# Altium PCB 400479.PcbDoc (part 2 of 2)
Units mm, origin at the board's own origin, x right, y up, seen from the top; angles counter-clockwise.
Board outline 46.04 x 15.24 mm, 4 copper layers (Top Layer, Mid-Layer 1, Mid-Layer 2, Bottom Layer), stack 2.007 mm thick; 83 components, 46 nets, 247 pads, 135 vias.
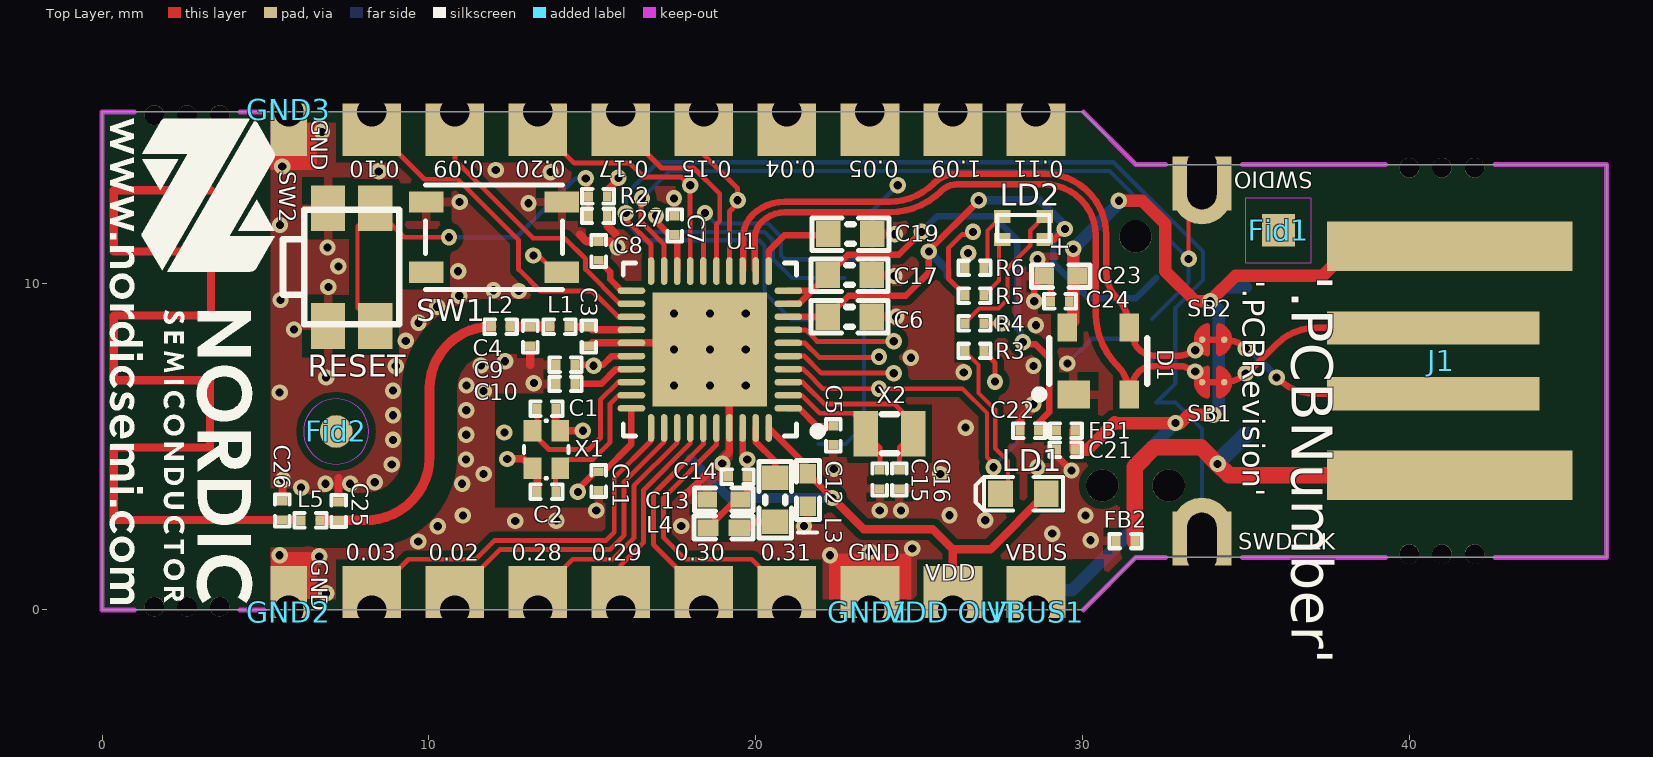
[diagram p0: Top Layer view]

## Via types
v1: diameter 0.5, hole 0.25, Top Layer to Bottom Layer, tented both sides, 135 vias

## Nets (pads, with @x,y where several pads share a name; then routed paths per layer and width w, separated by ;. In a path a pad name is that pad's centre, name@x,y a point inside that pad or via, vN(x,y) a via of type N, cw(c..) or ccw(c..) an arc to the next point about the centre after c; other vN are vias at no path point) (continued)
NetC8_1: (continued)
  Top Layer w0.2: C8.1@15.175,10.702 15.19,10.702 15.55,10.342 15.55,10.117 15.897,9.77 U1.21
NetC19_1: C19.1 U1.11 | length 2.6
  Top Layer w0.2: U1.11 20.4,10.983 20.882,11.465 ; 20.878,11.468 C19.1@22.21,11.468
NetD+_1: D+.1 J1.3 SB2.2 | length 7
  Top Layer w0.2: SB2.2 34.351,8.27 cw(c34.351,7.352) v1(35,8.001) ; v1(35.941,7.112) ccw(c37.144,8.315) 37.144,6.614 J1.3
  Bottom Layer w0.2: D+.1@35.077,8.001 35.966,7.112 v1@36.043,7.112
NetD-_1: D-.1 J1.2 SB1.2 | length 7
  Top Layer w0.2: SB1.2 34.351,6.97 ccw(c34.351,7.888) v1(35,7.239) ccw(c35,7.355) 35.082,7.273 35.941,8.132 cw(c37.144,6.929) 37.144,8.63 J1.2
NetFB2_1: FB2.1 J1.4 UGND.1 | length 12.4
  Top Layer w0.508: FB2.1 31.603,4.374 32.207,4.978 33.63,4.978 v1(34.138,4.47) 34.483,4.125 J1.4@39.853,4.125
  Bottom Layer w0.508: v1(34.138,4.47) 34.138,4.508 UGND.1
NetL3_1: L3.1 L4.2 | length 1.2
  Top Layer w0.2: L4.2 19.8,2.52 19.975,2.695 20.177,2.695 L3.1
NetL3_2: L3.2 U1.39 | length 1.8
  Top Layer w0.2: U1.39 20,5.15 20.6,4.55 L3.2
NetLD1_1: LD1.1 R3.1 | length 5.1
  Top Layer w0.127: R3.1 26.41,7.91 26.825,7.495 26.825,6.638 27.33,6.132 27.33,4.949 27.72,4.56 27.72,3.556 LD1.1
NetLD2_1: LD2.1 R4.1 | length 4.6
  Top Layer w0.127: R4.1 26.41,8.786 26.844,9.22 27.429,9.22 27.703,9.494 27.703,10.456 28.403,11.157 28.403,11.613 28.825,12.034 LD2.1
NetLD2_2: LD2.2 R5.2 | length 1.9
  Top Layer w0.127: R5.2 27.449,10.086 27.449,11.239 LD2.2
NetLD2_3: LD2.3 R6.2 | length 1.8
  Top Layer w0.127: R6.2 27.1,10.584 27.1,11.609 27.525,12.034 LD2.3
P0.00/XL1: C15.1 U1.2 X2.1 | length 4.3
  Top Layer w0.15: U1.2 21.41,6.57 21.962,6.018 22.975,6.018 ; 22.975,6.02 23.375,5.62 X2.1 23.8,4.97 C15.1
P0.01/XL2: C16.1 U1.3 X2.2 | length 6
  Top Layer w0.15: U1.3 21.433,6.97 21.55,6.853 21.552,6.853 22.1,6.305 24.239,6.305 24.825,5.718 X2.2 24.4,4.97 C16.1
P0.02/AIN0: 0.02.1 U1.32 | length 10.2
  Top Layer w0.15: 0.02.1@10.795,0 10.795,0.465 12.175,1.845 15.534,1.845 15.975,2.286 15.975,3.921 17.2,5.146 U1.32
P0.03/AIN1: 0.03.1 U1.31 | length 12.3
  Top Layer w0.15: 0.03.1@8.255,0 8.255,0.429 9.378,1.552 11.432,1.552 12.002,2.122 15.42,2.122 15.675,2.377 15.675,4.045 16.8,5.17 U1.31
P0.04/AIN2: 0.04.1 TP1.1 U1.4 | length 19.1
  Top Layer w0.127: v1(23.775,6.77) 26.334,6.77 27.076,6.027 27.076,4.674 27.28,4.47 v1(27.28,4.369)
  Top Layer w0.15: U1.4 21.457,7.37 21.557,7.27 21.559,7.27 22.059,6.77 v1(23.775,6.77)
  Mid-Layer 1 w0.15: 20.955,15.24 20.955,14.79 23.046,12.699 23.046,7.443 23.719,6.77 v1(23.775,6.77)
  Bottom Layer w0.127: v1(27.28,4.369) 27.28,4.4 TP1.1
P0.05/AIN3: 0.05.1 U1.5 | length 12.2
  Top Layer w0.15: U1.5 21.483,7.77 22.008,7.245 v1(24.225,7.245)
  Mid-Layer 1 w0.15: 23.495,15.24 23.495,8.165 23.323,7.993 23.323,7.557 23.635,7.245 v1(24.225,7.245)
P0.09: 0.09.1 U1.22 | length 8.9
  Top Layer w0.15: 10.795,15.24 10.795,13.774 13.193,11.376 14.161,11.376 14.797,10.739 14.797,10.421 15.848,9.37 U1.22
P0.10: 0.10.1 U1.23 | length 11.3
  Top Layer w0.15: 8.255,15.24 8.255,14.765 8.28,14.765 9.867,13.178 10.886,13.178 12.748,11.317 12.748,10.422 13.409,9.761 15,9.761 15.791,8.97 U1.23
P0.11: 0.11.1 U1.7 | length 14.7
  Top Layer w0.15: U1.7 21.532,8.57 21.882,8.22 v1(24.226,8.22)
  Mid-Layer 1 w0.15: v1(24.35,12.995) 24.766,13.411 28.191,13.411 28.575,13.795 28.575,15.24
  Bottom Layer w0.15: v1(24.226,8.22) 23.582,8.864 23.582,12.227 v1(24.35,12.995)
P0.30/AIN6: 0.30.1 U1.35 | length 6.8
  Top Layer w0.15: U1.35 18.4,5.073 16.875,3.548 16.875,1.995 18.415,0.455 0.30.1@18.415,0
P0.31/AIN7: 0.31.1 U1.36 | length 9
  Top Layer w0.15: U1.36 18.8,5.049 17.175,3.424 17.175,2.22 17.842,1.553 19.878,1.553 20.955,0.476 0.31.1@20.955,0
P1.09: 1.09.1 U1.6 | length 11.9
  Top Layer w0.15: U1.6 21.508,8.17 21.958,7.72 23.75,7.72 v1(23.775,7.745)
  Mid-Layer 1 w0.15: v1@23.774,7.745 23.774,13.337 24.125,13.688 24.968,13.688 26.035,14.755 26.035,15.24
RESET: C27.2 P1.10 R2.1 SW2.1 U1.16 | length 32
  Top Layer w0.127: SW2.1@8.363,8.69 7.816,9.237 7.816,11.743 8.363,12.29 9.249,11.405 v1(10.617,11.405) ; v1(14.801,13.207) 14.801,13.106 14.89,13.018 R2.1 14.889,12.655 14.889,12.058 C27.2
  Top Layer w0.15: U1.16 18.4,12.095 v1(18.45,12.145)
  Mid-Layer 2 w0.127: v1(14.801,13.207) 15.117,13.207 15.4,12.924 15.4,12.148 15.923,11.625 17.93,11.625 v1(18.45,12.145)
  Bottom Layer w0.127: v1(10.617,11.405) 12.674,11.405 14.465,13.196 14.79,13.196 v1(14.801,13.207) ; v1(18.45,12.145) 18.771,11.824 20.374,11.824 20.779,11.419 20.779,10.85 20.899,10.731 23.205,10.731 23.316,10.619 23.316,5.651 22.746,5.08 P1.10
RF: C25.1 L2.2 L5.1 | length 9.5
  Top Layer w0.3: L5.1 8.073,2.743 ccw(c8.073,4.695) 8.46,2.782 ccw(c8.073,4.695) 10.025,4.695 10.025,6.78 cw(c11.915,6.78) L2.2
SW1: 0.17.1 SW1.1 U1.15 | length 13.5
  Top Layer w0.15: v1(13.2,10.845) 13.267,10.778 13.423,10.778 13.87,10.331 SW1.1 ; 15.875,15.24 15.875,14.77 17.121,13.524 18.108,13.524 18.902,12.73 18.902,11.897 18.8,11.795 U1.15
  Mid-Layer 1 w0.15: v1(13.2,10.845) 13.2,11.545 14.177,12.522 14.177,13.32 14.516,13.659 14.744,13.659 15.875,14.79 15.875,15.24
SWDCLK: J2.4 P1.4 pad.3@33.655,2.54 SWDCLK.1 U1.20 | length 40.8
  Top Layer w0.15: v1@16.026,11.958 16.8,11.184 U1.20
  Bottom Layer w0.127: P1.4 21.094,8.89 20.275,9.709 20.275,10.636 20.271,10.64 20.271,11.145 20.102,11.314 16.572,11.314 16.05,11.836 16.05,12.121 v1(16.026,12.145) 16.026,12.719 17.007,13.7 30.954,13.7 33.689,10.964 33.689,10.092 32.842,9.246 32.842,6.934 J2.4 32.843,6.35 33.655,5.538 33.655,2.54 33.655,2.06 33.655,1.61
SWDIO: J2.2 P1.2 pad.3@33.655,12.7 SWDIO.1 U1.19 | length 34.6
  Top Layer w0.127: v1(33.249,10.744) 33.249,13.224 33.655,13.63
  Top Layer w0.15: v1(16.525,12.595) 16.498,12.568 16.498,11.878 17.2,11.176 U1.19
  Bottom Layer w0.127: v1@16.396,12.536 16.509,12.423 16.509,11.883 16.822,11.57 20.269,11.57 20.525,11.314 20.525,10.745 21.11,10.16 P1.2 P1.2@22.715,10.16 ; v1(16.525,12.595) 17.366,13.435 30.825,13.435 32.41,11.85 32.41,11.582 v1(33.249,10.744) 33.249,10.018 J2.2@32.131,8.9 ; SWDIO.1@33.655,13.259 33.655,13.63
VBUS: C17.1 C22.2 FB1.2 U1.9 U1.10 | length 16.2
  Top Layer w0.2: U1.9 21.325,9.37 21.725,9.77 ; U1.10 21.725,9.77 ; v1(25.076,11.57) 24.378,10.872 22.827,10.872 C17.1 21.725,9.77 ; v1(28.175,8.194) 28.232,8.137 28.559,8.137 28.98,7.716 28.98,6.053 28.657,5.73 C22.2 ; C22.2 FB1.2
  Bottom Layer w0.2: v1(25.076,11.57) 25.553,12.047 27.273,12.047 28.003,11.317 28.003,8.609 28.118,8.495 28.118,8.251 v1(28.175,8.194)
VBUS': C21.2 C23.2 C24.2 D1.4 FB1.1 J1.1 J2.5 VBUS1.1 VBUS2.1 | length 35.5
  Top Layer w0.381: D1.4 29.718,8.833 v1(29.718,11.049) ; FB1.1 C21.2 30.15,4.902 30.988,5.74 31.008,5.72 v1(32.85,5.72) 33,5.72 33.25,5.97 v1(34,5.97) ; v1(31.115,12.522) 31.824,12.522 32.537,11.809 32.537,10.363 33.452,9.449 v1(33.909,9.449) 34.684,10.223 37.351,10.223 38.257,11.13 J1.1
  Bottom Layer w0.381: VBUS1.1@28.575,0 29.185,0.61 29.693,0.61 31.547,2.464 31.547,4.417 v1(32.85,5.72) ; v1(29.718,11.049) 31.115,12.446 v1(31.115,12.522) ; v1(34,5.97) 34.175,6.145 34.175,9.183 v1(33.909,9.449) 34.33,9.87 VBUS2.1
VDD_nRF: "VDD nRF.1" "VDD OUT.1" C6.1 C7.1 C11.1 C12.1 J2.1 LD1.2 LD2.4 P1.1 R2.2 U1.8 U1.18 U1.30 U1.40 | length 70.6
  Top Layer w0.2: v1@14.536,3.665 15.101,4.23 C11.1 15.355,4.23 16.2,5.075 U1.30 ; v1@16.87,11.975 17.36,11.485 C7.1 17.6,11.41 U1.18 ; U1.40 21.6,4.37 C12.1 v1(22.346,3.424) ; U1.8 C6.1 22.848,9.618 24.595,9.618 25.301,10.324 v1(25.301,10.97) ; v1@25.372,11.073 v1@26.695,12.395
  Top Layer w0.203: LD2.4 29.139,11.334 v1(29.464,11.659)
  Top Layer w0.25: R2.2@15.47,12.667 15.47,12.84 v1@15.826,13.196
  Top Layer w0.254: v1(22.346,3.424) 23.3,2.47 25.419,2.47 26.035,1.854 ; 26.035,0.178 26.035,1.854 ; LD1.2@28.889,3.559 27.184,1.854 26.035,1.854
  Mid-Layer 2 w0.2: v1(16.95,12.065) 17.009,12.124 17.009,13.545
  Mid-Layer 2 w0.25: v1(15.801,13.22) 16.125,13.545 17.009,13.545 25.775,13.545 v1@26.826,12.494
  Mid-Layer 2 w0.3: v1@14.536,3.665 15.57,3.665 16.045,3.19 22.113,3.19 v1(22.346,3.424) 25.301,6.379 25.301,10.895 v1@25.376,10.97
  Bottom Layer w0.203: v1@29.464,11.76 29.108,11.405 29.108,10.617 30.188,9.538 31.636,9.538 J2.1
  Bottom Layer w0.25: v1(26.826,12.536) 28.688,12.536 v1@29.464,11.76
  Bottom Layer w0.254: v1@25.368,10.962 25.368,10.902 25.875,10.395 P1.1@25.875,10.209
  Bottom Layer w0.3: 18,4.62 19.196,3.424 v1(22.346,3.424)
  other v1: 14.561,3.614
XC1: C1.1 U1.28 X1.1 | length 5.6
  Top Layer w0.15: C1.1 13.311,5.624 X1.1 13.171,5.416 13.678,4.909 14.897,4.909 15.25,5.262 15.25,6.429 15.791,6.97 U1.28
XC2: C2.1 U1.29 X1.3 | length 4.6
  Top Layer w0.15: C2.1 13.881,4.194 X1.3 14.296,4.609 15.022,4.609 15.55,5.137 15.55,6.305 15.815,6.57 U1.29
pads on no net: Fid1.0 Fid2.0 J2.0 J2.6 J2.7 J2.8 J2.9 J2.10 P1.6 P1.7 P1.8 SW1.0

## Polygon pours and split planes (outlines as drawn)
GND on Bottom Layer "Bottom_Layer-GND" (solid, remove dead copper, pour order 42): -2.54,-2.54 -2.54,17.78 48.26,17.78 48.26,-2.54
GND on Mid-Layer 2 "Mid_Layer_2-GND" (solid, remove dead copper, pour order 41): 0,0 0,15.24 30.027,15.24 31.637,13.63 46.039,13.63 46.039,1.61 31.637,1.61 30.027,0
GND on Mid-Layer 1 "Mid_Layer_1-GND" (solid, pour order 39): 0,0 0,15.24 30.027,15.24 31.637,13.63 46.039,13.63 46.039,1.61 31.637,1.61 30.027,0
GND on Top Layer "Top_Layer-GND" (solid, remove dead copper, pour order 37): -2.54,-2.606 -2.54,17.78 48.26,17.78 48.26,-2.606

## Keep-outs
Keep-Out Layer:
  lines w0.15: 30.027,0 31.637,1.61 32.537,1.61 ; 30.027,15.24 31.637,13.63 32.537,13.63 ; 34.9,1.61 39.27,1.61 ; 34.9,13.63 39.27,13.63 ; 42.628,1.61 46.039,1.61 46.039,13.63 42.628,13.63
  lines w0.152: 0.99,0 0,0 0,15.24 0.99,15.24 ; 4.216,0 4.953,0 ; 4.216,15.24 4.953,15.24

## Other copper
Top Layer:
  rectangle net GND: 22.25,0.326 24.765,1.727
  rectangle net GND: 5.156,0.33 6.579,1.778
  rectangle net GND: 5.156,13.462 6.579,14.91
  pour cut-out: 26.072,9.265 26.072,7.91 26.104,7.91 26.125,7.889 26.125,9.27
  pour cut-out: 22.225,5.187 22.225,4.933 22.2,4.933 22.2,5.187
  pour cut-out: 9.091,9.593 9.091,9.702 9.192,9.803 9.192,9.906 9.188,9.906 8.875,9.593
  pour cut-out: 4.693,14.91 4.693,15.606 31.394,15.606 31.394,14.91
  pour cut-out: 30.44,0.326 30.44,-2.605 4.483,-2.606 4.483,0.326
  pour cut-out: -0.508,16.724 5.156,16.724 5.156,-1.107 -0.508,-1.107
  pour cut-out: 12.021,6.636 12.021,3.131 15.037,3.131 15.037,6.636
  pour cut-out: 15.1,7.779 13.425,7.779 13.425,8.245 13.325,8.245 13.325,9.295 15.1,9.295
Mid-Layer 1:
  rectangle net GND: 5.156,13.462 6.579,14.91
  rectangle net GND: 5.156,0.33 6.579,1.778
  rectangle net GND: 22.25,0.326 24.765,1.727
  pour cut-out: 4.693,14.91 4.693,15.606 31.394,15.606 31.394,14.91
  pour cut-out: 30.44,0.326 30.44,-2.605 4.483,-2.606 4.483,0.326
  pour cut-out: -0.508,16.724 5.156,16.724 5.156,-1.107 -0.508,-1.107
Mid-Layer 2:
  rectangle net GND: 5.156,13.462 6.579,14.91
  rectangle net GND: 5.156,0.33 6.579,1.778
  rectangle net GND: 22.25,0.326 24.765,1.727
  pour cut-out: 4.693,14.91 4.693,15.606 31.394,15.606 31.394,14.91
  pour cut-out: 30.44,0.326 30.44,-2.605 4.483,-2.606 4.483,0.326
  pour cut-out: -0.508,16.724 5.156,16.724 5.156,-1.107 -0.508,-1.107
Bottom Layer:
  rectangle net GND: 22.25,0.326 24.765,1.727
  rectangle net GND: 5.156,0.33 6.579,1.778
  rectangle net GND: 5.156,13.462 6.579,14.91
  pour cut-out: 27.28,9.017 27.704,9.017 27.707,9.02 27.7,9.027 27.7,9.12 27.28,9.12
  pour cut-out: 23.85,11.945 23.85,12 23.855,11.995 24.947,11.995 24.947,11.945
  pour cut-out: 30.44,0.326 30.44,-2.605 4.223,-2.606 4.223,0.326
  pour cut-out: 4.743,14.91 4.743,15.606 31.394,15.606 31.394,14.91
  pour cut-out: -0.508,16.724 5.156,16.724 5.156,-1.107 -0.508,-1.107
Multi-Layer:
  pour cut-out: 32.039,1.61 32.039,13.63 46.039,13.63 46.039,1.61
  pour cut-out: 24.932,1.553 30.675,1.553 30.675,0.326 24.932,0.326
  pour cut-out: 30.725,13.687 7.152,13.687 7.152,14.914 30.725,14.914
  pour cut-out: 7.152,1.553 22.058,1.553 22.058,0.326 7.152,0.326

## Silkscreen, mask and mechanical layers (free items; w line width, h text height)
Top Overlay:
  drawing of 44 lines, arcs and shapes, not listed
  text "'.PCBNumber'" at 35.992,10.236 h2.16 r270
  text "'.PCBRevision'" at 34.9,10.084 h0.69 r270
  text "RESET" at 6.293,7.142 h0.69
  text "VDD" at 25.191,0.901 h0.51
Bottom Overlay:
  lines w0.2: 5.319,5.12 ccw(c6.319,5.12) 6.319,4.12 11.319,4.12 ccw(c11.319,5.12) 12.319,5.12 12.319,10.12 ccw(c11.319,10.12) 11.319,11.12 6.319,11.12 ccw(c6.319,10.12) 5.319,10.12 5.319,5.12
  text "LABEL" at 8.342,5.339 h1.02 r270
  text "VDD / nRF" at 17.137,2.165 h0.51 r270
  text "nRF52833-Dongle" at 0.813,0.432 h2.41 r270
Board Outline:
  the board outline again, w0.152
Bottom Assembly:
  drawing of 40 lines, arcs and shapes, not listed
Top Impedance Info:
  lines w0.229: 14.285,8.67 14.894,8.67 14.909,8.655 14.994,8.57 16.15,8.57
  lines w0.254: 5.3,2.754 6.09,2.754
  lines w0.3: 6.66,2.743 8.073,2.743 ccw(c8.073,4.695) 8.46,2.782 ccw(c8.073,4.695) 10.025,4.695 10.025,6.78 cw(c11.915,6.78) 11.915,8.67 ; 12.485,8.67 13.715,8.67
  text "50ohm impedance" at 4.525,10.195 h1.52
Placement:
  lines w0.152: 32.039,1.61 32.039,13.63

## Dimensions
31.637,1.61 to 46.039,1.61 on Dimension
0,0 to 46.039,1.61 on Dimension
0,0 to 30.027,0 on Dimension
46.039,13.63 to 46.039,1.61 on Dimension
0,15.24 to 0,0 on Dimension

## Text inside footprints (layer, text, board x,y; h text height)
J1: Placement "Card edge" at 46.689,10.67 h1.57 r270; PCB Info "0.030in [0.75mm]" at 58.139,-11.474 h2.29 r270; PCB Info "45" at 91.792,-10.121 h2.29 r270; PCB Info "o" at 94.332,-14.248 h1.22 r270; PCB Info "DETAIL A" at 105.764,7.576 h3.81 r270; PCB Info "0.025in [0.625mm]" at 77.29,32.41 h2.29 r270; PCB Info "SEE DETAIL A" at 44.862,32.196 h1.91 r270
LD2: Top Overlay "+" at 29.569,10.759 h0.6 r90
P1: Bottom Overlay "1" at 25.375,11.125 h1.02 r270